# Altium PCB FMC_DIO_32ch_lvds_a.PcbDoc (part 5 of 6)
Units mm, origin at the board's own origin, x right, y up, seen from the top; angles counter-clockwise.
Board outline 69.13 x 77.46 mm, 4 copper layers (Top Layer, G, SUP, Bottom Layer), stack 1.448 mm thick; 558 components, 348 nets, 1996 pads, 784 vias.
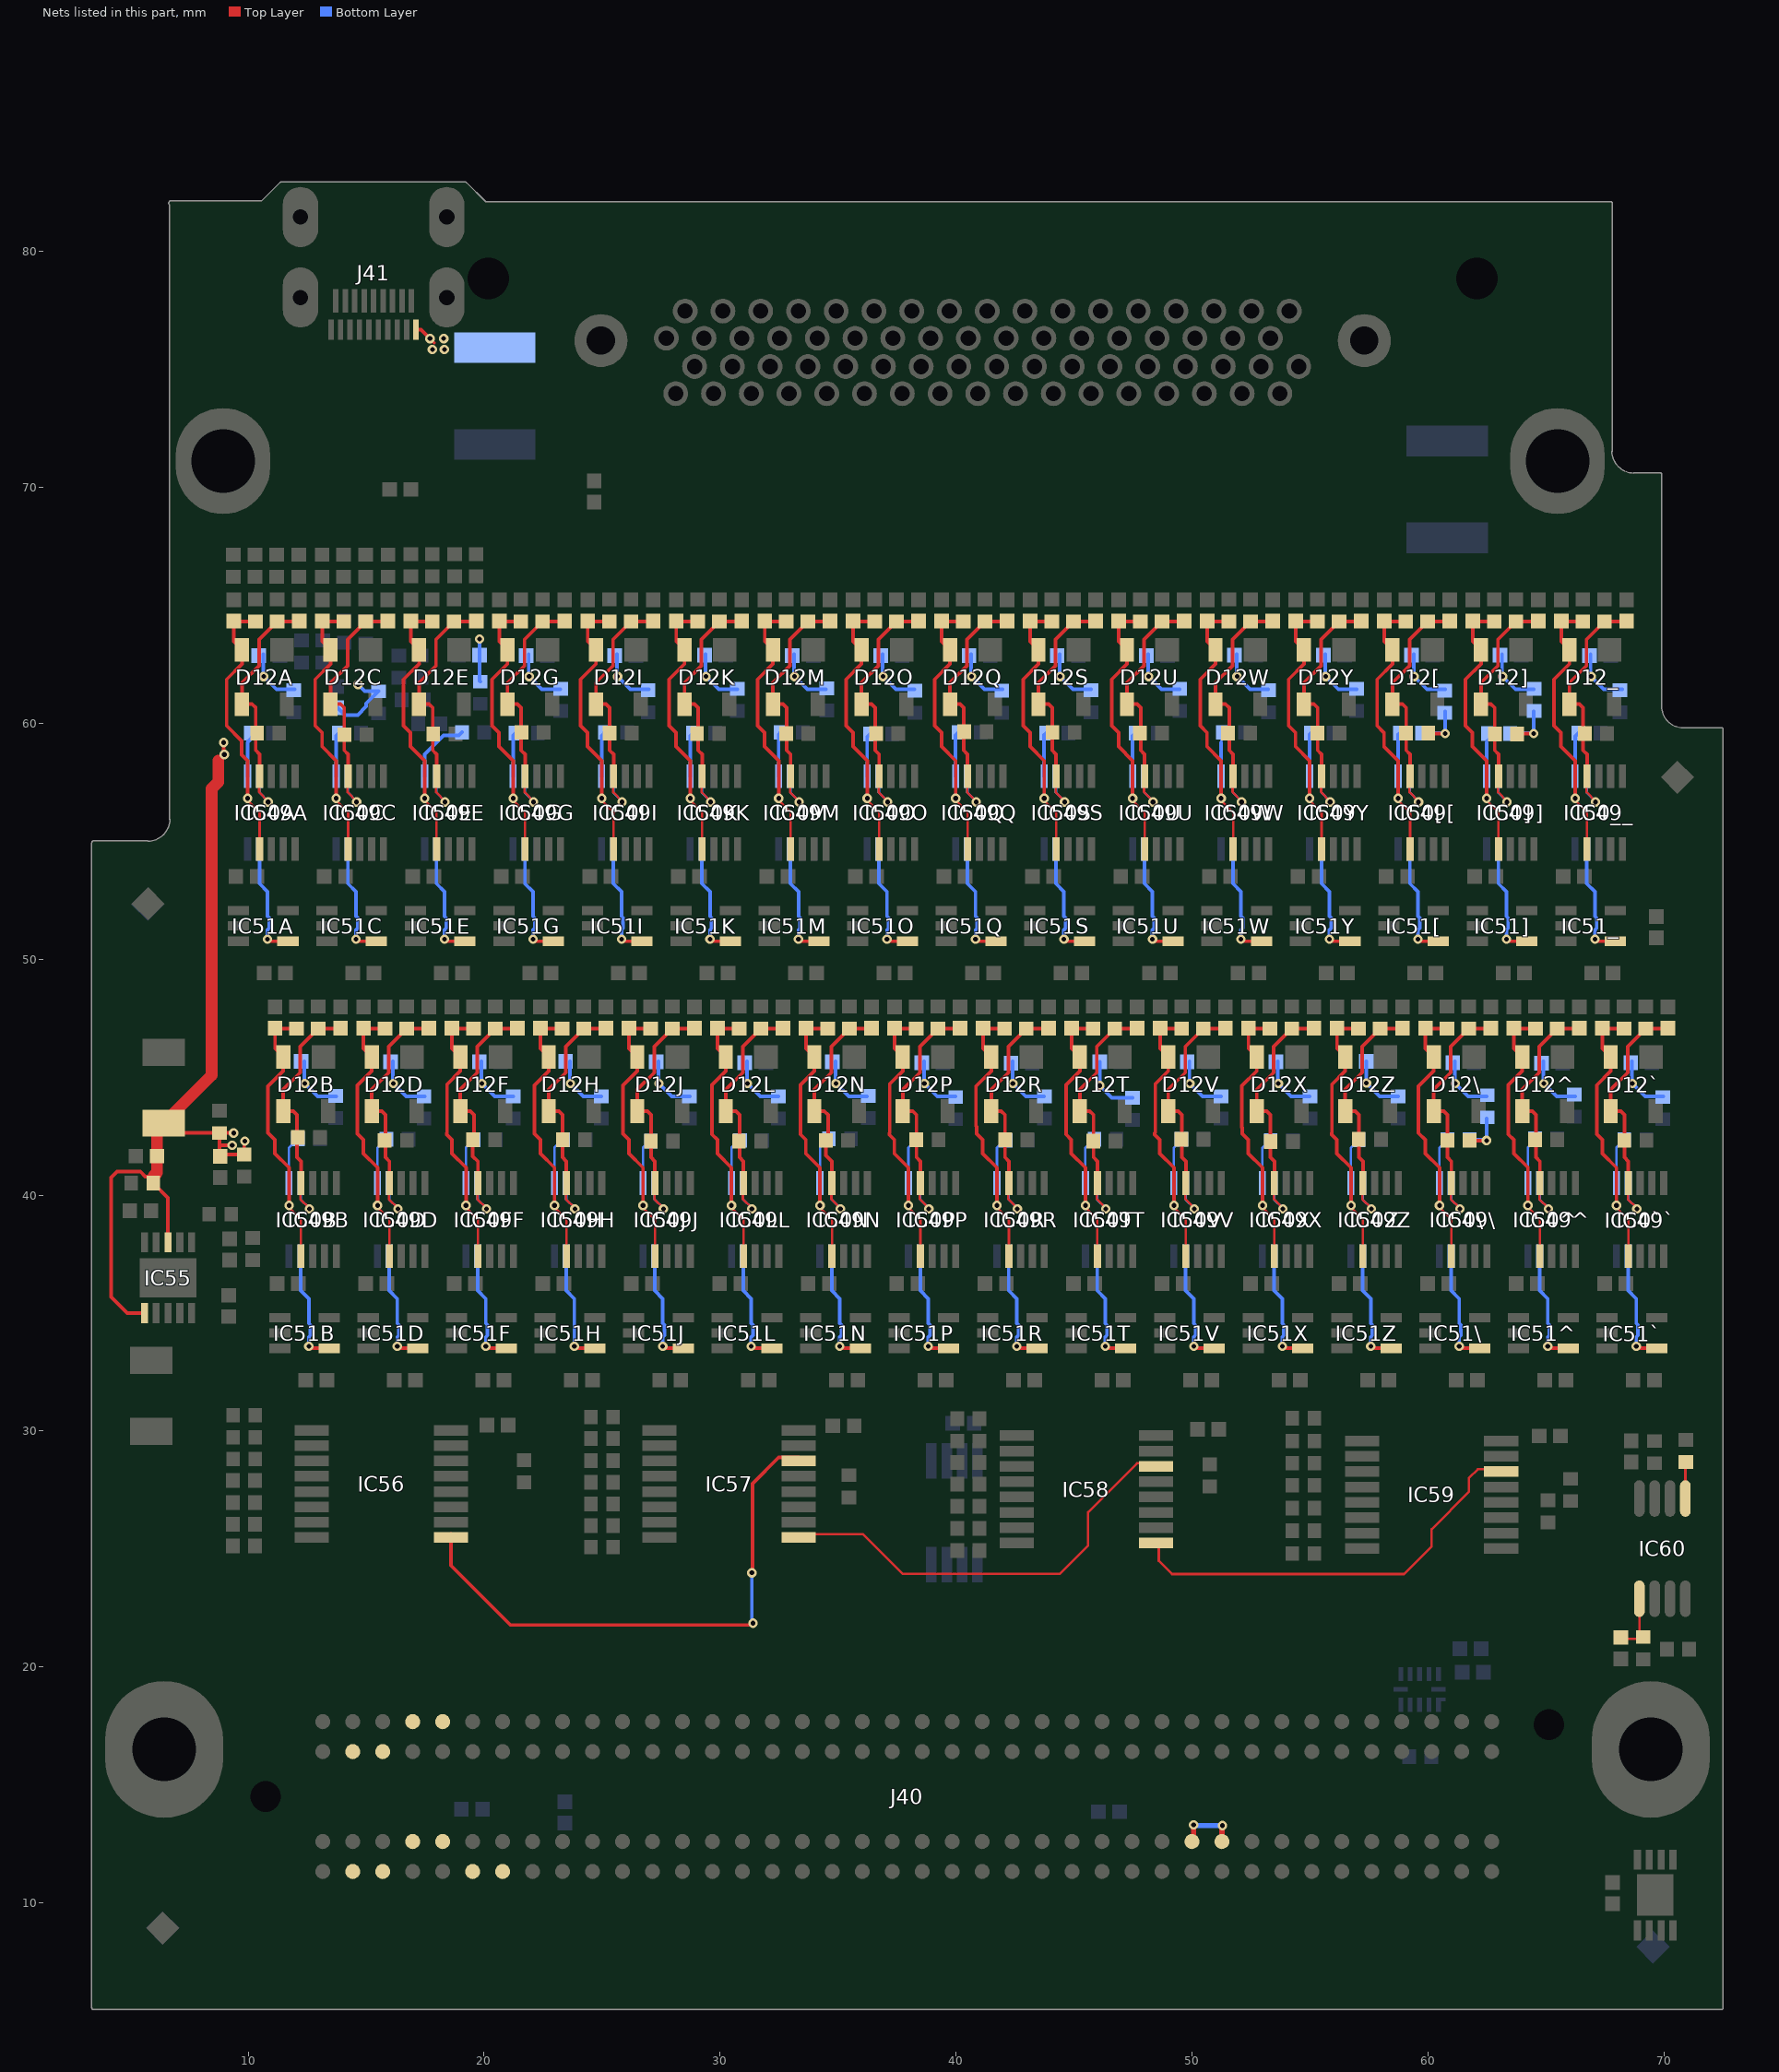
[diagram p7: the nets of this part, all layers, seen from the top]

## Via types
v1: diameter 0.4, hole 0.2, Top Layer to Bottom Layer, tented both sides, 760 vias
v2: diameter 0.4, hole 0.2, Top Layer to Bottom Layer, 24 vias

## Nets (pads, with @x,y where several pads share a name; then routed paths per layer and width w, separated by ;. In a path a pad name is that pad's centre, name@x,y a point inside that pad or via, vN(x,y) a via of type N, cw(c..) or ccw(c..) an arc to the next point about the centre after c; other vN are vias at no path point) (continued)
LVDS_REF: C139[.2 C139\.2 C139].2 C139^.2 C139_.2 C139`.2 C139A.2 C139B.2 C139C.2 C139D.2 C139E.2 C139F.2 C139G.2 C139H.2 C139I.2 C139J.2 C139K.2 C139L.2 C139M.2 C139N.2 C139O.2 C139P.2 C139Q.2 C139R.2 C139S.2 C139T.2 C139U.2 C139V.2 C139W.2 C139X.2 C139Y.2 C139Z.2 C147.2 C151.2 C152.2 IC55.3 IC55.6 R1[.2 R1\.2 R1].2 R1^.2 R1_.2 R1`.2 R1A.2 R1B.2 R1C.2 R1D.2 R1E.2 R1F.2 R1G.2 R1H.2 R1I.2 R1J.2 R1K.2 R1L.2 R1M.2 R1N.2 R1O.2 R1P.2 R1Q.2 R1R.2 R1S.2 R1T.2 R1U.2 R1V.2 R1W.2 R1X.2 R1Y.2 R1Z.2 R252.1 R254.1 R255.2 | length 116.4
  Top Layer w0.152: IC55.6@5.604,35 4.875,35 4.191,35.684 4.191,40.742 4.445,40.996 4.673,40.996 4.678,41.001 5.411,41.001 5.416,40.996 5.436,40.996 5.639,40.792 R252.1@5.982,40.792 ; C151.2@5.982,41.498 R252.1@5.982,40.792 ; IC55.3@6.604,38 6.604,39.891 R252.1@5.982,40.513 R252.1@5.982,40.792 ; C147.2@7.315,42.634 R254.1@8.788,42.634 ; C152.2@8.814,41.649 C152.2@8.885,41.72 ; v1@8.966,58.674 v1(8.966,59.182) ; v1(9.322,42.113) 8.788,42.113 ; v1(9.385,42.634) R254.1@8.788,42.634 ; v1(9.855,42.291) 9.83,42.266 R255.2@9.83,41.72 C152.2@8.885,41.72 ; v1(19.805,63.569) v1@19.837,63.602 ; 8.788,42.113 8.788,41.816 C152.2@8.885,41.72 ; 8.788,42.113 R254.1@8.788,42.634
  Top Layer w0.5: R252.1@5.982,40.792 6.14,40.95 C151.2@6.14,41.656 6.14,42.765 C147.2@6.426,43.052 8.458,45.084 8.458,57.226 8.738,57.506 8.738,58.42
  Bottom Layer w0.152: v1@10.636,61.998 C139A.2@10.636,62.919 ; v1(10.654,61.979) 11.2,61.433 R1A.2@11.975,61.433 ; v1@12.386,44.748 C139D.2@12.386,45.669 ; v1(12.404,44.729) 12.95,44.183 R1B.2@13.725,44.183 ; C139C.2@13.741,60.662 13.785,60.662 14.097,60.35 14.646,60.35 15.007,60.711 15.007,60.841 R1C.2@15.519,61.354 14.948,61.354 v1(14.656,61.646) ; v1@16.136,44.748 C139F.2@16.136,45.669 ; v1(16.154,44.729) 16.7,44.183 R1D.2@17.475,44.183 ; v1(19.805,63.569) C139E.2@19.805,62.89 19.805,61.793 R1E.2@19.837,61.76 ; v1@19.886,44.748 C139H.2@19.886,45.669 ; v1(19.904,44.729) 20.45,44.183 R1F.2@21.225,44.183 ; v1@21.886,61.998 C139G.2@21.886,62.919 ; v1(21.904,61.979) 22.45,61.433 R1G.2@23.225,61.433 ; v1@23.636,44.748 C139J.2@23.636,45.669 ; v1(23.654,44.729) 24.2,44.183 R1H.2@24.975,44.183 ; v1@25.636,61.998 C139I.2@25.636,62.919 ; v1(25.654,61.979) 26.2,61.433 R1I.2@26.975,61.433 ; v1@27.386,44.748 C139L.2@27.386,45.669 ; v1(27.404,44.729) 27.95,44.183 R1J.2@28.725,44.183 ; v1@29.386,61.998 C139K.2@29.386,62.919 ; v1(29.404,61.979) 29.95,61.433 R1K.2@30.725,61.433 ; v1@31.136,44.748 C139N.2@31.136,45.669 ; v1(31.154,44.729) 31.7,44.183 R1L.2@32.475,44.183 ; v1@33.136,61.998 C139M.2@33.136,62.919 ; v1(33.154,61.979) 33.7,61.433 R1M.2@34.475,61.433 ; v1@34.886,44.748 C139P.2@34.886,45.669 ; v1(34.904,44.729) 35.45,44.183 R1N.2@36.225,44.183 ; v1@36.886,61.998 C139O.2@36.886,62.919 ; v1(36.904,61.979) 37.45,61.433 R1O.2@38.225,61.433 ; v1@38.636,44.748 C139R.2@38.636,45.669 ; v1(38.654,44.729) 39.2,44.183 R1P.2@39.975,44.183 ; v1@40.636,61.998 C139Q.2@40.636,62.919 ; v1(40.654,61.979) 41.2,61.433 R1Q.2@41.975,61.433 ; v1@42.386,44.748 C139T.2@42.386,45.669 ; v1(42.404,44.729) 42.95,44.183 R1R.2@43.725,44.183 ; v1@44.386,61.998 C139S.2@44.386,62.919 ; v1(44.404,61.979) 44.95,61.433 R1S.2@45.725,61.433 ; C139V.2@46.083,45.644 v1(46.083,44.646) 46.596,44.133 R1T.2@47.473,44.133 ; v1@48.136,61.998 C139U.2@48.136,62.919 ; v1(48.154,61.979) 48.7,61.433 R1U.2@49.475,61.433 ; v1@49.886,44.748 C139X.2@49.886,45.669 ; v1(49.904,44.729) 50.45,44.183 R1V.2@51.225,44.183 ; v1@51.886,61.998 C139W.2@51.886,62.919 ; v1(51.904,61.979) 52.45,61.433 R1W.2@53.225,61.433 ; v1@53.636,44.748 C139Z.2@53.636,45.669 ; v1(53.654,44.729) 54.2,44.183 R1X.2@54.975,44.183 ; v1@55.636,61.998 C139Y.2@55.636,62.919 ; v1(55.654,61.979) 56.2,61.433 R1Y.2@56.975,61.433 ; C139\.2@57.386,45.669 v1(57.386,44.748) 57.95,44.183 R1Z.2@58.725,44.183 ; v1@59.386,61.998 C139[.2@59.386,62.919 ; v1(59.404,61.979) 59.95,61.433 R1[.2@60.725,61.433 ; v1@61.136,44.748 C139^.2@61.136,45.669 ; v1(61.154,44.729) 61.7,44.183 R1\.2@62.475,44.183 ; v1@63.136,61.998 C139].2@63.136,62.919 ; v1(63.154,61.979) 63.7,61.433 R1].2@64.475,61.433 ; v1@64.886,44.748 C139`.2@64.886,45.669 ; v1(64.904,44.729) 65.45,44.183 R1^.2@66.225,44.183 ; v1@66.886,61.998 C139_.2@66.886,62.919 ; v1(66.904,61.979) 67.45,61.433 R1_.2@68.225,61.433 ; v1@68.636,44.748 C139B.2@68.636,45.669 ; v1(68.654,44.729) 69.2,44.183 R1`.2@69.975,44.183
  other v1: 8.992,58.674
NetC140[_2: C140[.2 D12[.3 IC49[.8 IC50[.6 R243[.2 R245[.2 | length 11.2
  Top Layer w0.102: IC49[.8@59.236,57.761 59.214,57.738 59.214,57.081 59.595,56.7 v1(59.595,56.663)
  Top Layer w0.152: IC49[.8@59.236,57.761 59.236,58.683 59.071,58.848 59.071,59.598 59.071,60.652 58.913,60.81 D12[.3@58.489,60.81 58.489,61.721 59.211,62.443 59.211,63.547 R243[.2@59.973,64.309 60.892,64.309 C140[.2@60.912,64.329
  Bottom Layer w0.102: IC50[.6@59.228,57.761 59.228,57.066 59.595,56.7 v1(59.595,56.663)
NetC140\_2: C140\.2 D12\.3 IC49\.8 IC50\.6 R243\.2 R245\.2 | length 11.2
  Top Layer w0.102: IC49\.8@60.986,40.511 60.964,40.488 60.964,39.831 61.345,39.45 v1(61.345,39.413)
  Top Layer w0.152: R245\.2@60.82,42.316 60.821,41.598 60.986,41.433 IC49\.8@60.986,40.511 ; R245\.2@60.821,42.348 60.821,43.402 60.663,43.56 D12\.3@60.239,43.56 60.239,44.471 60.961,45.193 60.961,46.297 R243\.2@61.723,47.059 62.642,47.059 C140\.2@62.662,47.079
  Bottom Layer w0.102: IC50\.6@60.978,40.511 60.978,39.816 61.345,39.45 v1(61.345,39.413)
NetC140]_2: C140].2 D12].3 IC49].8 IC50].6 R243].2 R245].2 | length 11.2
  Top Layer w0.102: IC49].8@62.986,57.761 62.964,57.738 62.964,57.081 63.345,56.7 v1(63.345,56.663)
  Top Layer w0.152: IC49].8@62.986,57.761 62.986,58.683 62.821,58.848 62.821,59.598 62.821,60.652 62.663,60.81 D12].3@62.239,60.81 62.239,61.721 62.961,62.443 62.961,63.547 R243].2@63.723,64.309 64.642,64.309 C140].2@64.662,64.329
  Bottom Layer w0.102: IC50].6@62.978,57.761 62.978,57.066 63.345,56.7 v1(63.345,56.663)
NetC140^_2: C140^.2 D12^.3 IC49^.8 IC50^.6 R243^.2 R245^.2 | length 11.2
  Top Layer w0.102: IC49^.8@64.736,40.511 64.714,40.488 64.714,39.831 65.095,39.45 v1(65.095,39.413)
  Top Layer w0.152: R245^.2@64.529,42.342 64.571,42.299 64.571,41.598 64.736,41.433 IC49^.8@64.736,40.511 ; R245^.2@64.571,42.348 64.571,43.402 64.413,43.56 D12^.3@63.989,43.56 63.989,44.471 64.711,45.193 64.711,46.297 R243^.2@65.473,47.059 66.392,47.059 C140^.2@66.412,47.079
  Bottom Layer w0.102: IC50^.6@64.728,40.511 64.728,39.816 65.095,39.45 v1(65.095,39.413)
NetC140__2: C140_.2 D12_.3 IC49_.8 IC50_.6 R243_.2 R245_.2 | length 11.2
  Top Layer w0.102: IC49_.8@66.736,57.761 66.714,57.738 66.714,57.081 67.095,56.7 v1(67.095,56.663)
  Top Layer w0.152: IC49_.8@66.736,57.761 66.736,58.683 66.571,58.848 66.571,60.652 66.413,60.81 D12_.3@65.989,60.81 65.989,61.721 66.711,62.443 66.711,63.547 R243_.2@67.473,64.309 68.392,64.309 C140_.2@68.412,64.329
  Bottom Layer w0.102: IC50_.6@66.728,57.761 66.728,57.066 67.095,56.7 v1(67.095,56.663)
NetC140`_2: C140`.2 D12`.3 IC49`.8 IC50`.6 R243`.2 R245`.2 | length 11.2
  Top Layer w0.102: IC49`.8@68.486,40.511 68.464,40.488 68.464,39.831 68.845,39.45 v1(68.845,39.413)
  Top Layer w0.152: IC49`.8@68.486,40.511 68.486,41.433 68.321,41.598 68.321,43.402 68.163,43.56 D12`.3@67.739,43.56 67.739,44.471 68.461,45.193 68.461,46.297 R243`.2@69.223,47.059 70.142,47.059 C140`.2@70.162,47.079
  Bottom Layer w0.102: IC50`.6@68.478,40.511 68.478,39.816 68.845,39.45 v1(68.845,39.413)
NetC140A_2: C140A.2 D12A.3 IC49A.8 IC50A.6 R243A.2 R245A.2 | length 11.2
  Top Layer w0.102: IC49A.8@10.486,57.761 10.464,57.738 10.464,57.081 10.845,56.7 v1(10.845,56.663)
  Top Layer w0.152: IC49A.8@10.486,57.761 10.486,58.683 10.321,58.848 10.321,60.652 10.163,60.81 D12A.3@9.739,60.81 9.739,61.721 10.461,62.443 10.461,63.547 R243A.2@11.223,64.309 12.142,64.309 C140A.2@12.162,64.329
  Bottom Layer w0.102: IC50A.6@10.478,57.761 10.478,57.066 10.845,56.7 v1(10.845,56.663)
NetC140B_2: C140B.2 D12B.3 IC49B.8 IC50B.6 R243B.2 R245B.2 | length 11.2
  Top Layer w0.102: IC49B.8@12.236,40.511 12.214,40.488 12.214,39.831 12.595,39.45 v1(12.595,39.413)
  Top Layer w0.152: IC49B.8@12.236,40.511 12.236,41.433 12.071,41.598 12.071,42.348 12.071,43.402 11.913,43.56 D12B.3@11.489,43.56 11.489,44.471 12.211,45.193 12.211,46.297 R243B.2@12.973,47.059 13.892,47.059 C140B.2@13.912,47.079
  Bottom Layer w0.102: IC50B.6@12.228,40.511 12.228,39.816 12.595,39.45 v1(12.595,39.413)
NetC140C_2: C140C.2 D12C.3 IC49C.8 IC50C.6 R243C.2 R245C.2 | length 11.2
  Top Layer w0.102: IC49C.8@14.236,57.761 14.214,57.738 14.214,57.081 14.595,56.7 v1(14.595,56.663)
  Top Layer w0.152: IC49C.8@14.236,57.761 14.236,58.683 14.071,58.848 14.071,60.652 13.913,60.81 D12C.3@13.489,60.81 13.489,61.721 14.211,62.443 14.211,63.547 R243C.2@14.973,64.309 15.892,64.309 C140C.2@15.912,64.329
  Bottom Layer w0.102: IC50C.6@14.228,57.761 14.228,57.066 14.595,56.7 v1(14.595,56.663)
NetC140D_2: C140D.2 D12D.3 IC49D.8 IC50D.6 R243D.2 R245D.2 | length 11.2
  Top Layer w0.102: IC49D.8@15.986,40.511 15.964,40.488 15.964,39.831 16.345,39.45 v1(16.345,39.413)
  Top Layer w0.152: R245D.2@15.786,42.316 15.821,42.281 15.821,41.598 15.986,41.433 IC49D.8@15.986,40.511 ; R245D.2@15.821,42.348 15.821,43.402 15.663,43.56 D12D.3@15.239,43.56 15.239,44.471 15.961,45.193 15.961,46.297 R243D.2@16.723,47.059 17.642,47.059 C140D.2@17.662,47.079
  Bottom Layer w0.102: IC50D.6@15.978,40.511 15.978,39.816 16.345,39.45 v1(16.345,39.413)
NetC140E_2: C140E.2 D12E.3 IC49E.8 IC50E.6 R243E.2 R245E.2 | length 11.2
  Top Layer w0.102: IC49E.8@17.986,57.761 17.964,57.738 17.964,57.081 18.345,56.7 v1(18.345,56.663)
  Top Layer w0.152: IC49E.8@17.986,57.761 17.986,58.683 17.821,58.848 17.821,60.652 17.663,60.81 D12E.3@17.239,60.81 17.239,61.721 17.961,62.443 17.961,63.547 R243E.2@18.723,64.309 19.642,64.309 C140E.2@19.662,64.329
  Bottom Layer w0.102: IC50E.6@17.978,57.761 17.978,57.066 18.345,56.7 v1(18.345,56.663)
NetC140F_2: C140F.2 D12F.3 IC49F.8 IC50F.6 R243F.2 R245F.2 | length 11.2
  Top Layer w0.102: IC49F.8@19.736,40.511 19.714,40.488 19.714,39.831 20.095,39.45 v1(20.095,39.413)
  Top Layer w0.152: R245F.2@19.52,42.342 19.52,41.65 19.736,41.433 IC49F.8@19.736,40.511 ; R245F.2@19.571,42.348 19.571,43.402 19.413,43.56 D12F.3@18.989,43.56 18.989,44.471 19.711,45.193 19.711,46.297 R243F.2@20.473,47.059 21.392,47.059 C140F.2@21.412,47.079
  Bottom Layer w0.102: IC50F.6@19.728,40.511 19.728,39.816 20.095,39.45 v1(20.095,39.413)
NetC140G_2: C140G.2 D12G.3 IC49G.8 IC50G.6 R243G.2 R245G.2 | length 11.2
  Top Layer w0.102: IC49G.8@21.736,57.761 21.714,57.738 21.714,57.081 22.095,56.7 v1(22.095,56.663)
  Top Layer w0.152: IC49G.8@21.736,57.761 21.736,58.683 21.571,58.848 21.571,59.598 21.571,60.652 21.413,60.81 D12G.3@20.989,60.81 20.989,61.721 21.711,62.443 21.711,63.547 R243G.2@22.473,64.309 23.392,64.309 C140G.2@23.412,64.329
  Bottom Layer w0.102: IC50G.6@21.728,57.761 21.728,57.066 22.095,56.7 v1(22.095,56.663)
NetC140H_2: C140H.2 D12H.3 IC49H.8 IC50H.6 R243H.2 R245H.2 | length 11.2
  Top Layer w0.102: IC49H.8@23.486,40.511 23.464,40.488 23.464,39.831 23.845,39.45 v1(23.845,39.413)
  Top Layer w0.152: R245H.2@23.321,42.348 23.321,43.402 23.163,43.56 D12H.3@22.739,43.56 22.739,44.471 23.461,45.193 23.461,46.297 R243H.2@24.223,47.059 25.142,47.059 C140H.2@25.162,47.079 ; R245H.2@23.33,42.342 23.321,42.333 23.321,41.598 23.486,41.433 IC49H.8@23.486,40.511
  Bottom Layer w0.102: IC50H.6@23.478,40.511 23.478,39.816 23.845,39.45 v1(23.845,39.413)
NetC140I_2: C140I.2 D12I.3 IC49I.8 IC50I.6 R243I.2 R245I.2 | length 11.2
  Top Layer w0.102: IC49I.8@25.486,57.761 25.464,57.738 25.464,57.081 25.845,56.7 v1(25.845,56.663)
  Top Layer w0.152: IC49I.8@25.486,57.761 25.486,58.683 25.321,58.848 25.321,60.652 25.163,60.81 D12I.3@24.739,60.81 24.739,61.721 25.461,62.443 25.461,63.547 R243I.2@26.223,64.309 27.142,64.309 C140I.2@27.162,64.329
  Bottom Layer w0.102: IC50I.6@25.478,57.761 25.478,57.066 25.845,56.7 v1(25.845,56.663)
NetC140J_2: C140J.2 D12J.3 IC49J.8 IC50J.6 R243J.2 R245J.2 | length 11.2
  Top Layer w0.102: IC49J.8@27.236,40.511 27.214,40.488 27.214,39.831 27.595,39.45 v1(27.595,39.413)
  Top Layer w0.152: IC49J.8@27.236,40.511 27.236,41.433 27.071,41.598 27.071,43.402 26.913,43.56 D12J.3@26.489,43.56 26.489,44.471 27.211,45.193 27.211,46.297 R243J.2@27.973,47.059 28.892,47.059 C140J.2@28.912,47.079
  Bottom Layer w0.102: IC50J.6@27.228,40.511 27.228,39.816 27.595,39.45 v1(27.595,39.413)
NetC140K_2: C140K.2 D12K.3 IC49K.8 IC50K.6 R243K.2 R245K.2 | length 11.2
  Top Layer w0.102: IC49K.8@29.236,57.761 29.214,57.738 29.214,57.081 29.595,56.7 v1(29.595,56.663)
  Top Layer w0.152: IC49K.8@29.236,57.761 29.236,58.683 29.071,58.848 29.071,59.598 29.071,60.652 28.913,60.81 D12K.3@28.489,60.81 28.489,61.721 29.211,62.443 29.211,63.547 R243K.2@29.973,64.309 30.892,64.309 C140K.2@30.912,64.329
  Bottom Layer w0.102: IC50K.6@29.228,57.761 29.228,57.066 29.595,56.7 v1(29.595,56.663)
NetC140L_2: C140L.2 D12L.3 IC49L.8 IC50L.6 R243L.2 R245L.2 | length 11.1
  Top Layer w0.102: IC49L.8@30.986,40.511 30.964,40.488 30.964,39.831 31.345,39.45 v1(31.345,39.413)
  Top Layer w0.152: R245L.2@30.797,42.291 30.821,42.267 30.821,41.598 30.986,41.433 IC49L.8@30.986,40.511 ; R245L.2@30.821,42.348 30.821,43.402 30.663,43.56 D12L.3@30.239,43.56 30.239,44.471 30.961,45.193 30.961,46.297 R243L.2@31.723,47.059 32.642,47.059 C140L.2@32.662,47.079
  Bottom Layer w0.102: IC50L.6@30.978,40.511 30.978,39.816 31.345,39.45 v1(31.345,39.413)
NetC140M_2: C140M.2 D12M.3 IC49M.8 IC50M.6 R243M.2 R245M.2 | length 11.2
  Top Layer w0.102: IC49M.8@32.986,57.761 32.964,57.738 32.964,57.081 33.345,56.7 v1(33.345,56.663)
  Top Layer w0.152: IC49M.8@32.986,57.761 32.986,58.683 32.821,58.848 32.821,59.598 32.821,60.652 32.663,60.81 D12M.3@32.239,60.81 32.239,61.721 32.961,62.443 32.961,63.547 R243M.2@33.723,64.309 34.642,64.309 C140M.2@34.662,64.329
  Bottom Layer w0.102: IC50M.6@32.978,57.761 32.978,57.066 33.345,56.7 v1(33.345,56.663)
NetC140N_2: C140N.2 D12N.3 IC49N.8 IC50N.6 R243N.2 R245N.2 | length 11.2
  Top Layer w0.102: IC49N.8@34.736,40.511 34.714,40.488 34.714,39.831 35.095,39.45 v1(35.095,39.413)
  Top Layer w0.152: R245N.2@34.48,42.316 34.48,41.689 34.736,41.433 IC49N.8@34.736,40.511 ; R245N.2@34.571,42.348 34.571,43.402 34.413,43.56 D12N.3@33.989,43.56 33.989,44.471 34.711,45.193 34.711,46.297 R243N.2@35.473,47.059 36.392,47.059 C140N.2@36.412,47.079
  Bottom Layer w0.102: IC50N.6@34.728,40.511 34.728,39.816 35.095,39.45 v1(35.095,39.413)
NetC140O_2: C140O.2 D12O.3 IC49O.8 IC50O.6 R243O.2 R245O.2 | length 11.2
  Top Layer w0.102: IC49O.8@36.736,57.761 36.714,57.738 36.714,57.081 37.095,56.7 v1(37.095,56.663)
  Top Layer w0.152: IC49O.8@36.736,57.761 36.736,58.683 36.571,58.848 36.571,59.598 36.571,60.652 36.413,60.81 D12O.3@35.989,60.81 35.989,61.721 36.711,62.443 36.711,63.547 R243O.2@37.473,64.309 38.392,64.309 C140O.2@38.412,64.329
  Bottom Layer w0.102: IC50O.6@36.728,57.761 36.728,57.066 37.095,56.7 v1(37.095,56.663)
NetC140P_2: C140P.2 D12P.3 IC49P.8 IC50P.6 R243P.2 R245P.2 | length 11.2
  Top Layer w0.102: IC49P.8@38.486,40.511 38.464,40.488 38.464,39.831 38.845,39.45 v1(38.845,39.413)
  Top Layer w0.152: R245P.2@38.316,42.342 38.321,42.337 38.321,41.598 38.486,41.433 IC49P.8@38.486,40.511 ; R245P.2@38.321,42.348 38.321,43.402 38.163,43.56 D12P.3@37.739,43.56 37.739,44.471 38.461,45.193 38.461,46.297 R243P.2@39.223,47.059 40.142,47.059 C140P.2@40.162,47.079
  Bottom Layer w0.102: IC50P.6@38.478,40.511 38.478,39.816 38.845,39.45 v1(38.845,39.413)
NetC140Q_2: C140Q.2 D12Q.3 IC49Q.8 IC50Q.6 R243Q.2 R245Q.2 | length 11.2
  Top Layer w0.102: IC49Q.8@40.486,57.761 40.464,57.738 40.464,57.081 40.845,56.7 v1(40.845,56.663)
  Top Layer w0.152: IC49Q.8@40.486,57.761 40.486,58.683 40.321,58.848 40.321,59.598 40.321,60.652 40.163,60.81 D12Q.3@39.739,60.81 39.739,61.721 40.461,62.443 40.461,63.547 R243Q.2@41.223,64.309 42.142,64.309 C140Q.2@42.162,64.329
  Bottom Layer w0.102: IC50Q.6@40.478,57.761 40.478,57.066 40.845,56.7 v1(40.845,56.663)
NetC140R_2: C140R.2 D12R.3 IC49R.8 IC50R.6 R243R.2 R245R.2 | length 11.2
  Top Layer w0.102: IC49R.8@42.236,40.511 42.214,40.488 42.214,39.831 42.595,39.45 v1(42.595,39.413)
  Top Layer w0.152: R245R.2@42.071,42.348 42.071,43.402 41.913,43.56 D12R.3@41.489,43.56 41.489,44.471 42.211,45.193 42.211,46.297 R243R.2@42.973,47.059 43.892,47.059 C140R.2@43.912,47.079 ; R245R.2@42.075,42.342 42.071,42.338 42.071,41.598 42.236,41.433 IC49R.8@42.236,40.511
  Bottom Layer w0.102: IC50R.6@42.228,40.511 42.228,39.816 42.595,39.45 v1(42.595,39.413)
NetC140S_2: C140S.2 D12S.3 IC49S.8 IC50S.6 R243S.2 R245S.2 | length 11.2
  Top Layer w0.102: IC49S.8@44.236,57.761 44.214,57.738 44.214,57.081 44.595,56.7 v1(44.595,56.663)
  Top Layer w0.152: IC49S.8@44.236,57.761 44.236,58.683 44.071,58.848 44.071,59.598 44.071,60.652 43.913,60.81 D12S.3@43.489,60.81 43.489,61.721 44.211,62.443 44.211,63.547 R243S.2@44.973,64.309 45.892,64.309 C140S.2@45.912,64.329
  Bottom Layer w0.102: IC50S.6@44.228,57.761 44.228,57.066 44.595,56.7 v1(44.595,56.663)
NetC140T_2: C140T.2 D12T.3 IC49T.8 IC50T.6 R243T.2 R245T.2 | length 11.2
  Top Layer w0.102: IC49T.8@45.986,40.511 45.964,40.488 45.964,39.831 46.345,39.45 v1(46.345,39.413)
  Top Layer w0.152: IC49T.8@45.986,40.511 45.986,41.433 45.821,41.598 45.821,43.402 45.663,43.56 D12T.3@45.239,43.56 45.239,44.471 45.961,45.193 45.961,46.297 R243T.2@46.723,47.059 47.642,47.059 C140T.2@47.662,47.079
  Bottom Layer w0.102: IC50T.6@45.978,40.511 45.978,39.816 46.345,39.45 v1(46.345,39.413)
NetC140U_2: C140U.2 D12U.3 IC49U.8 IC50U.6 R243U.2 R245U.2 | length 11.2
  Top Layer w0.102: IC49U.8@47.986,57.761 47.964,57.738 47.964,57.081 48.345,56.7 v1(48.345,56.663)
  Top Layer w0.152: IC49U.8@47.986,57.761 47.986,58.683 47.821,58.848 47.821,59.598 47.821,60.652 47.663,60.81 D12U.3@47.239,60.81 47.239,61.721 47.961,62.443 47.961,63.547 R243U.2@48.723,64.309 49.642,64.309 C140U.2@49.662,64.329
  Bottom Layer w0.102: IC50U.6@47.978,57.761 47.978,57.066 48.345,56.7 v1(48.345,56.663)
NetC140V_2: C140V.2 D12V.3 IC49V.8 IC50V.6 R243V.2 R245V.2 | length 11.2
  Top Layer w0.102: IC49V.8@49.736,40.511 49.714,40.488 49.714,39.831 50.095,39.45 v1(50.095,39.413)
  Top Layer w0.152: IC49V.8@49.736,40.511 49.736,41.433 49.571,41.598 49.571,43.402 49.413,43.56 D12V.3@48.989,43.56 48.989,44.471 49.711,45.193 49.711,46.297 R243V.2@50.473,47.059 51.392,47.059 C140V.2@51.412,47.079
  Bottom Layer w0.102: IC50V.6@49.728,40.511 49.728,39.816 50.095,39.45 v1(50.095,39.413)
NetC140W_2: C140W.2 D12W.3 IC49W.8 IC50W.6 R243W.2 R245W.2 | length 11.2
  Top Layer w0.102: IC49W.8@51.736,57.761 51.714,57.738 51.714,57.081 52.095,56.7 v1(52.095,56.663)
  Top Layer w0.152: IC49W.8@51.736,57.761 51.736,58.683 51.571,58.848 51.571,59.598 51.571,60.652 51.413,60.81 D12W.3@50.989,60.81 50.989,61.721 51.711,62.443 51.711,63.547 R243W.2@52.473,64.309 53.392,64.309 C140W.2@53.412,64.329
  Bottom Layer w0.102: IC50W.6@51.728,57.761 51.728,57.066 52.095,56.7 v1(52.095,56.663)
NetC140X_2: C140X.2 D12X.3 IC49X.8 IC50X.6 R243X.2 R245X.2 | length 11.1
  Top Layer w0.102: IC49X.8@53.486,40.511 53.464,40.488 53.464,39.831 53.845,39.45 v1(53.845,39.413)
  Top Layer w0.152: R245X.2@53.321,42.348 53.321,43.402 53.163,43.56 D12X.3@52.739,43.56 52.739,44.471 53.461,45.193 53.461,46.297 R243X.2@54.223,47.059 55.142,47.059 C140X.2@55.162,47.079 ; R245X.2@53.327,42.266 53.321,42.259 53.321,41.598 53.486,41.433 IC49X.8@53.486,40.511
  Bottom Layer w0.102: IC50X.6@53.478,40.511 53.478,39.816 53.845,39.45 v1(53.845,39.413)
NetC140Y_2: C140Y.2 D12Y.3 IC49Y.8 IC50Y.6 R243Y.2 R245Y.2 | length 11.2
  Top Layer w0.102: IC49Y.8@55.486,57.761 55.464,57.738 55.464,57.081 55.845,56.7 v1(55.845,56.663)
  Top Layer w0.152: IC49Y.8@55.486,57.761 55.486,58.683 55.321,58.848 55.321,59.598 55.321,60.652 55.163,60.81 D12Y.3@54.739,60.81 54.739,61.721 55.461,62.443 55.461,63.547 R243Y.2@56.223,64.309 57.142,64.309 C140Y.2@57.162,64.329
  Bottom Layer w0.102: IC50Y.6@55.478,57.761 55.478,57.066 55.845,56.7 v1(55.845,56.663)
NetC140Z_2: C140Z.2 D12Z.3 IC49Z.8 IC50Z.6 R243Z.2 R245Z.2 | length 11.2
  Top Layer w0.102: IC49Z.8@57.236,40.511 57.214,40.488 57.214,39.831 57.595,39.45 v1(57.595,39.413)
  Top Layer w0.152: R245Z.2@57.061,42.367 R245Z.2@57.071,42.357 ; IC49Z.8@57.236,40.511 57.236,41.433 57.071,41.598 R245Z.2@57.071,42.357 ; C140Z.2@58.912,47.079 58.892,47.059 R243Z.2@57.973,47.059 57.211,46.297 57.211,45.193 56.489,44.471 D12Z.3@56.489,43.56 56.913,43.56 57.071,43.402 R245Z.2@57.071,42.357
  Bottom Layer w0.102: IC50Z.6@57.228,40.511 57.228,39.816 57.595,39.45 v1(57.595,39.413)
NetC141[_2: C141[.2 D12[.2 IC49[.1 IC50[.5 R244[.2 R246[.2 | length 14.4
  Top Layer w0.102: v1(58.731,56.816) 58.731,56.728 59.236,56.222 IC49[.1@59.236,54.661
  Top Layer w0.152: v1(58.731,56.816) 58.731,58.416 58.131,59.016 58.131,59.598 57.839,59.89 57.839,61.86 58.489,62.51 D12[.2@58.489,63.11 58.139,63.46 C141[.2@58.139,64.33 58.159,64.31 R246[.2@59.054,64.31
  Bottom Layer w0.102: IC50[.5@58.728,57.761 58.731,57.758 v1(58.731,56.816)
  Bottom Layer w0.152: IC50[.5@58.728,57.761 58.728,59.516 R244[.2@58.801,59.588
NetC141\_2: C141\.2 D12\.2 IC49\.1 IC50\.5 R244\.2 R246\.2 | length 14.5
  Top Layer w0.102: v1(60.481,39.566) 60.481,39.478 60.986,38.972 IC49\.1@60.986,37.411
  Top Layer w0.152: v1(60.481,39.566) 60.481,41.166 59.881,41.766 59.881,42.348 59.596,42.633 59.596,42.872 59.589,42.879 59.589,44.61 60.239,45.26 D12\.2@60.239,45.86 59.889,46.21 C141\.2@59.889,47.08 59.909,47.06 R246\.2@60.804,47.06
  Bottom Layer w0.102: 60.478,41.98 IC50\.5@60.478,40.511 60.481,40.508 v1(60.481,39.566) ; 60.478,42.009 R244\.2@60.811,42.342
NetC141]_2: C141].2 D12].2 IC49].1 IC50].5 R244].2 R246].2 | length 15
  Top Layer w0.102: v1(62.481,56.816) 62.481,56.728 62.986,56.222 IC49].1@62.986,54.661
  Top Layer w0.152: v1(62.481,56.816) 62.481,58.416 61.881,59.016 ; R246].2@62.804,64.31 61.909,64.31 C141].2@61.889,64.33 61.889,63.46 D12].2@62.239,63.11 62.239,62.51 61.589,61.86 61.589,59.89 61.881,59.598 ; 61.881,59.016 61.881,59.598 ; 61.881,59.016 61.881,59.598
  Bottom Layer w0.102: IC50].5@62.478,57.761 62.481,57.758 v1(62.481,56.816) ; R244].2@62.478,59.259 R244].2@62.811,59.592
  Bottom Layer w0.152: IC50].5@62.478,57.761 62.478,59.167
NetC141^_2: C141^.2 D12^.2 IC49^.1 IC50^.5 R244^.2 R246^.2 | length 14.4
  Top Layer w0.102: v1(64.231,39.566) 64.231,39.478 64.736,38.972 IC49^.1@64.736,37.411
  Top Layer w0.152: v1(64.231,39.566) 64.231,41.166 63.631,41.766 63.631,42.348 63.404,42.575 63.404,44.675 63.989,45.26 D12^.2@63.989,45.86 63.639,46.21 C141^.2@63.639,47.08 63.659,47.06 R246^.2@64.554,47.06
  Bottom Layer w0.102: 64.228,41.98 IC50^.5@64.228,40.511 64.231,40.508 v1(64.231,39.566) ; 64.228,42.009 R244^.2@64.561,42.342
NetC141__2: C141_.2 D12_.2 IC49_.1 IC50_.5 R244_.2 R246_.2 | length 14.6
  Top Layer w0.102: v1(66.231,56.816) 66.231,56.728 66.736,56.222 IC49_.1@66.736,54.661
  Top Layer w0.152: v1(66.231,56.816) 66.231,58.416 65.631,59.016 65.631,59.598 65.339,59.89 65.339,61.86 65.989,62.51 D12_.2@65.989,63.11 65.639,63.46 C141_.2@65.639,64.33 65.659,64.31 R246_.2@66.554,64.31
  Bottom Layer w0.102: IC50_.5@66.228,57.761 66.231,57.758 v1(66.231,56.816) ; R244_.2@66.464,59.495 R244_.2@66.561,59.592
  Bottom Layer w0.152: IC50_.5@66.228,57.761 66.228,59.447 R244_.2@66.37,59.588
NetC141`_2: C141`.2 D12`.2 IC49`.1 IC50`.5 R244`.2 R246`.2 | length 14.4
  Top Layer w0.102: v1(67.981,39.566) 67.981,39.478 68.486,38.972 IC49`.1@68.486,37.411
  Top Layer w0.152: v1(67.981,39.566) 67.981,41.166 67.381,41.766 67.381,42.348 67.145,42.584 67.145,44.666 67.739,45.26 D12`.2@67.739,45.86 67.389,46.21 C141`.2@67.389,47.08 67.409,47.06 R246`.2@68.304,47.06
  Bottom Layer w0.102: 67.978,41.98 IC50`.5@67.978,40.511 67.981,40.508 v1(67.981,39.566) ; 67.978,42.009 R244`.2@68.311,42.342
NetC141A_2: C141A.2 D12A.2 IC49A.1 IC50A.5 R244A.2 R246A.2 | length 15
  Top Layer w0.102: v1(9.981,56.816) 9.981,56.728 10.486,56.222 IC49A.1@10.486,54.661
  Top Layer w0.152: v1(9.981,56.816) 9.981,58.416 9.728,58.669 9.728,59.251 9.089,59.89 9.089,61.86 9.739,62.51 D12A.2@9.739,63.11 9.389,63.46 C141A.2@9.389,64.33 9.409,64.31 R246A.2@10.304,64.31
  Bottom Layer w0.102: IC50A.5@9.978,57.761 9.981,57.758 v1(9.981,56.816) ; 9.978,59.259 R244A.2@10.311,59.592
  Bottom Layer w0.152: IC50A.5@9.978,57.761 9.969,57.77 9.969,59.182 R244A.2@10.376,59.588
NetC141B_2: C141B.2 D12B.2 IC49B.1 IC50B.5 R244B.2 R246B.2 | length 15.1
  Top Layer w0.102: v1(11.731,39.566) 11.731,39.478 12.236,38.972 IC49B.1@12.236,37.411
  Top Layer w0.152: v1(11.731,39.566) 11.731,41.166 11.131,41.766 ; R246B.2@12.054,47.06 11.159,47.06 C141B.2@11.139,47.08 11.139,46.21 D12B.2@11.489,45.86 11.489,45.26 10.839,44.61 10.839,42.64 11.131,42.348 ; 11.131,41.766 11.131,42.348 ; 11.131,41.766 11.131,42.348
  Bottom Layer w0.102: 11.728,41.98 IC50B.5@11.728,40.511 11.731,40.508 v1(11.731,39.566) ; 11.728,42.009 R244B.2@12.061,42.342
NetC141C_2: C141C.2 D12C.2 IC49C.1 IC50C.5 R244C.2 R246C.2 | length 14.4
  Top Layer w0.102: v1(13.731,56.816) 13.731,56.728 14.236,56.222 IC49C.1@14.236,54.661
  Top Layer w0.152: v1(13.731,56.816) 13.731,58.416 13.131,59.016 13.131,59.598 12.839,59.89 12.839,61.86 13.489,62.51 D12C.2@13.489,63.11 13.139,63.46 C141C.2@13.139,64.33 13.159,64.31 R246C.2@14.054,64.31
  Bottom Layer w0.102: IC50C.5@13.728,57.761 13.731,57.758 v1(13.731,56.816)
  Bottom Layer w0.152: IC50C.5@13.728,57.761 13.728,59.474 R244C.2@13.843,59.588
NetC141D_2: C141D.2 D12D.2 IC49D.1 IC50D.5 R244D.2 R246D.2 | length 14.4
  Top Layer w0.102: v1(15.481,39.566) 15.481,39.478 15.986,38.972 IC49D.1@15.986,37.411
  Top Layer w0.152: v1(15.481,39.566) 15.481,41.166 14.881,41.766 14.881,42.348 14.629,42.6 14.629,44.649 15.239,45.26 D12D.2@15.239,45.86 14.889,46.21 C141D.2@14.889,47.08 14.909,47.06 R246D.2@15.804,47.06
  Bottom Layer w0.102: 15.478,41.98 IC50D.5@15.478,40.511 15.481,40.508 v1(15.481,39.566) ; 15.478,42.009 R244D.2@15.811,42.342
NetC141E_2: C141E.2 D12E.2 IC49E.1 IC50E.5 R244E.2 R246E.2 | length 15.4
  Top Layer w0.102: v1(17.481,56.816) 17.481,56.728 17.986,56.222 IC49E.1@17.986,54.661
  Top Layer w0.152: v1(17.481,56.816) 17.481,58.416 16.881,59.016 16.881,59.598 16.589,59.89 16.589,61.86 17.239,62.51 D12E.2@17.239,63.11 16.889,63.46 C141E.2@16.889,64.33 16.909,64.31 R246E.2@17.804,64.31
  Bottom Layer w0.102: IC50E.5@17.478,57.761 17.481,57.758 v1(17.481,56.816)
  Bottom Layer w0.152: IC50E.5@17.478,57.761 17.478,58.677 18.283,59.482 18.93,59.482 R244E.2@19.063,59.614
NetC141F_2: C141F.2 D12F.2 IC49F.1 IC50F.5 R244F.2 R246F.2 | length 14.4
  Top Layer w0.102: v1(19.231,39.566) 19.231,39.478 19.736,38.972 IC49F.1@19.736,37.411
  Top Layer w0.152: v1(19.231,39.566) 19.231,41.166 18.631,41.766 18.631,42.348 18.417,42.562 18.417,42.626 18.428,42.637 18.428,44.698 18.989,45.26 D12F.2@18.989,45.86 18.639,46.21 C141F.2@18.639,47.08 18.659,47.06 R246F.2@19.554,47.06
  Bottom Layer w0.102: 19.228,41.98 IC50F.5@19.228,40.511 19.231,40.508 v1(19.231,39.566) ; 19.228,42.009 R244F.2@19.561,42.342
NetC141G_2: C141G.2 D12G.2 IC49G.1 IC50G.5 R244G.2 R246G.2 | length 14.4
  Top Layer w0.102: v1(21.231,56.816) 21.231,56.728 21.736,56.222 IC49G.1@21.736,54.661
  Top Layer w0.152: v1(21.231,56.816) 21.231,58.416 20.631,59.016 20.631,59.598 20.339,59.89 20.339,61.86 20.989,62.51 D12G.2@20.989,63.11 20.639,63.46 C141G.2@20.639,64.33 20.659,64.31 R246G.2@21.554,64.31
  Bottom Layer w0.102: IC50G.5@21.228,57.761 21.231,57.758 v1(21.231,56.816)
  Bottom Layer w0.152: IC50G.5@21.228,57.761 21.228,59.481 R244G.2@21.336,59.588
NetC141H_2: C141H.2 D12H.2 IC49H.1 IC50H.5 R244H.2 R246H.2 | length 14.4
  Top Layer w0.102: v1(22.981,39.566) 22.981,39.478 23.486,38.972 IC49H.1@23.486,37.411
  Top Layer w0.152: v1(22.981,39.566) 22.981,41.166 22.381,41.766 22.381,42.348 22.129,42.6 22.129,44.649 22.739,45.26 D12H.2@22.739,45.86 22.389,46.21 C141H.2@22.389,47.08 22.409,47.06 R246H.2@23.304,47.06
  Bottom Layer w0.102: 22.978,41.98 IC50H.5@22.978,40.511 22.981,40.508 v1(22.981,39.566) ; 22.978,42.009 R244H.2@23.311,42.342
NetC141I_2: C141I.2 D12I.2 IC49I.1 IC50I.5 R244I.2 R246I.2 | length 15.5
  Top Layer w0.102: v1(24.981,56.816) 24.981,56.728 25.486,56.222 IC49I.1@25.486,54.661
  Top Layer w0.152: v1(24.981,56.816) 24.981,58.416 24.381,59.016 ; R246I.2@25.304,64.31 24.409,64.31 C141I.2@24.389,64.33 24.389,63.46 D12I.2@24.739,63.11 24.739,62.51 24.089,61.86 24.089,59.89 24.381,59.598 ; 24.381,59.016 24.381,59.598 ; 24.381,59.016 24.381,59.598
  Bottom Layer w0.102: IC50I.5@24.978,57.761 24.981,57.758 v1(24.981,56.816) ; 24.978,59.259 R244I.2@25.311,59.592
  Bottom Layer w0.152: IC50I.5@24.978,57.761 24.978,59.472 R244I.2@25.12,59.614
NetC141J_2: C141J.2 D12J.2 IC49J.1 IC50J.5 R244J.2 R246J.2 | length 14.4
  Top Layer w0.102: v1(26.731,39.566) 26.731,39.478 27.236,38.972 IC49J.1@27.236,37.411
  Top Layer w0.152: v1(26.731,39.566) 26.731,41.166 26.131,41.766 26.131,42.348 25.879,42.6 25.879,44.649 26.489,45.26 D12J.2@26.489,45.86 26.139,46.21 C141J.2@26.139,47.08 26.159,47.06 R246J.2@27.054,47.06
  Bottom Layer w0.102: 26.728,41.98 IC50J.5@26.728,40.511 26.731,40.508 v1(26.731,39.566) ; 26.728,42.009 R244J.2@27.061,42.342
NetC141K_2: C141K.2 D12K.2 IC49K.1 IC50K.5 R244K.2 R246K.2 | length 14.6
  Top Layer w0.102: v1(28.731,56.816) 28.731,56.728 29.236,56.222 IC49K.1@29.236,54.661
  Top Layer w0.152: v1(28.731,56.816) 28.731,58.416 28.131,59.016 28.131,59.598 27.839,59.89 27.839,61.86 28.489,62.51 D12K.2@28.489,63.11 28.139,63.46 C141K.2@28.139,64.33 28.159,64.31 R246K.2@29.054,64.31
  Bottom Layer w0.102: IC50K.5@28.728,57.761 28.731,57.758 v1(28.731,56.816) ; R244K.2@28.956,59.487 R244K.2@29.061,59.592
  Bottom Layer w0.152: IC50K.5@28.728,57.761 28.728,59.463 R244K.2@28.854,59.588
NetC141L_2: C141L.2 D12L.2 IC49L.1 IC50L.5 R244L.2 R246L.2 | length 14.4
  Top Layer w0.102: v1(30.481,39.566) 30.481,39.478 30.986,38.972 IC49L.1@30.986,37.411
  Top Layer w0.152: v1(30.481,39.566) 30.481,41.166 29.881,41.766 29.881,42.348 29.655,42.573 29.655,44.676 30.239,45.26 D12L.2@30.239,45.86 29.889,46.21 C141L.2@29.889,47.08 29.909,47.06 R246L.2@30.804,47.06
  Bottom Layer w0.102: 30.478,41.98 IC50L.5@30.478,40.511 30.481,40.508 v1(30.481,39.566) ; 30.478,42.009 R244L.2@30.811,42.342
NetC141M_2: C141M.2 D12M.2 IC49M.1 IC50M.5 R244M.2 R246M.2 | length 14.4
  Top Layer w0.102: v1(32.481,56.816) 32.481,56.728 32.986,56.222 IC49M.1@32.986,54.661
  Top Layer w0.152: v1(32.481,56.816) 32.481,58.416 31.881,59.016 31.881,59.598 31.589,59.89 31.589,61.86 32.239,62.51 D12M.2@32.239,63.11 31.889,63.46 C141M.2@31.889,64.33 31.909,64.31 R246M.2@32.804,64.31
  Bottom Layer w0.102: IC50M.5@32.478,57.761 32.481,57.758 v1(32.481,56.816)
  Bottom Layer w0.152: IC50M.5@32.478,57.761 32.478,59.53 R244M.2@32.563,59.614
NetC141N_2: C141N.2 D12N.2 IC49N.1 IC50N.5 R244N.2 R246N.2 | length 14.4
  Top Layer w0.102: v1(34.231,39.566) 34.231,39.478 34.736,38.972 IC49N.1@34.736,37.411
  Top Layer w0.152: v1(34.231,39.566) 34.231,41.166 33.631,41.766 33.631,42.348 33.404,42.575 33.404,44.675 33.989,45.26 D12N.2@33.989,45.86 33.639,46.21 C141N.2@33.639,47.08 33.659,47.06 R246N.2@34.554,47.06
  Bottom Layer w0.102: 34.228,41.98 IC50N.5@34.228,40.511 34.231,40.508 v1(34.231,39.566) ; 34.228,42.009 R244N.2@34.561,42.342
NetC141O_2: C141O.2 D12O.2 IC49O.1 IC50O.5 R244O.2 R246O.2 | length 14.5
  Top Layer w0.102: v1(36.231,56.816) 36.231,56.728 36.736,56.222 IC49O.1@36.736,54.661
  Top Layer w0.152: v1(36.231,56.816) 36.231,58.416 35.631,59.016 35.631,59.598 35.339,59.89 35.339,61.86 35.989,62.51 D12O.2@35.989,63.11 35.639,63.46 C141O.2@35.639,64.33 35.659,64.31 R246O.2@36.554,64.31
  Bottom Layer w0.102: IC50O.5@36.228,57.761 36.231,57.758 v1(36.231,56.816) ; R244O.2@36.427,59.458 R244O.2@36.561,59.592
  Bottom Layer w0.152: IC50O.5@36.228,57.761 36.228,59.419 R244O.2@36.347,59.538
NetC141P_2: C141P.2 D12P.2 IC49P.1 IC50P.5 R244P.2 R246P.2 | length 14.4
  Top Layer w0.102: v1(37.981,39.566) 37.981,39.478 38.486,38.972 IC49P.1@38.486,37.411
  Top Layer w0.152: v1(37.981,39.566) 37.981,41.166 37.381,41.766 37.381,42.348 37.167,42.562 37.167,42.626 37.186,42.645 37.186,44.706 37.739,45.26 D12P.2@37.739,45.86 37.389,46.21 C141P.2@37.389,47.08 37.409,47.06 R246P.2@38.304,47.06
  Bottom Layer w0.102: 37.978,41.98 IC50P.5@37.978,40.511 37.981,40.508 v1(37.981,39.566) ; 37.978,42.009 R244P.2@38.311,42.342
NetC141Q_2: C141Q.2 D12Q.2 IC49Q.1 IC50Q.5 R244Q.2 R246Q.2 | length 14.6
  Top Layer w0.102: v1(39.981,56.816) 39.981,56.728 40.486,56.222 IC49Q.1@40.486,54.661
  Top Layer w0.152: v1(39.981,56.816) 39.981,58.416 39.381,59.016 39.381,59.598 39.089,59.89 39.089,61.86 39.739,62.51 D12Q.2@39.739,63.11 39.389,63.46 C141Q.2@39.389,64.33 39.409,64.31 R246Q.2@40.304,64.31
  Bottom Layer w0.102: IC50Q.5@39.978,57.761 39.981,57.758 v1(39.981,56.816) ; R244Q.2@40.22,59.501 R244Q.2@40.311,59.592
  Bottom Layer w0.152: IC50Q.5@39.978,57.761 39.978,59.486 R244Q.2@40.106,59.614
NetC141R_2: C141R.2 D12R.2 IC49R.1 IC50R.5 R244R.2 R246R.2 | length 14.5
  Top Layer w0.102: v1(41.731,39.566) 41.731,39.478 42.236,38.972 IC49R.1@42.236,37.411
  Top Layer w0.152: v1(41.731,39.566) 41.731,41.166 41.131,41.766 41.131,42.348 40.872,42.607 40.872,42.891 40.839,42.923 40.839,44.61 41.489,45.26 D12R.2@41.489,45.86 41.139,46.21 C141R.2@41.139,47.08 41.159,47.06 R246R.2@42.054,47.06
  Bottom Layer w0.102: 41.728,41.98 IC50R.5@41.728,40.511 41.731,40.508 v1(41.731,39.566) ; 41.728,42.009 R244R.2@42.061,42.342
NetC141S_2: C141S.2 D12S.2 IC49S.1 IC50S.5 R244S.2 R246S.2 | length 14.4
  Top Layer w0.102: v1(43.731,56.816) 43.731,56.728 44.236,56.222 IC49S.1@44.236,54.661
  Top Layer w0.152: v1(43.731,56.816) 43.731,58.416 43.131,59.016 43.131,59.598 42.839,59.89 42.839,61.86 43.489,62.51 D12S.2@43.489,63.11 43.139,63.46 C141S.2@43.139,64.33 43.159,64.31 R246S.2@44.054,64.31
  Bottom Layer w0.102: IC50S.5@43.728,57.761 43.731,57.758 v1(43.731,56.816)
  Bottom Layer w0.152: IC50S.5@43.728,57.761 43.728,59.502 R244S.2@43.815,59.588
NetC141T_2: C141T.2 D12T.2 IC49T.1 IC50T.5 R244T.2 R246T.2 | length 14.4
  Top Layer w0.102: v1(45.481,39.566) 45.481,39.478 45.986,38.972 IC49T.1@45.986,37.411
  Top Layer w0.152: v1(45.481,39.566) 45.481,41.166 44.881,41.766 44.881,42.348 44.654,42.575 44.654,44.675 45.239,45.26 D12T.2@45.239,45.86 44.889,46.21 C141T.2@44.889,47.08 44.909,47.06 R246T.2@45.804,47.06
  Bottom Layer w0.102: 45.478,41.98 IC50T.5@45.478,40.511 45.481,40.508 v1(45.481,39.566) ; 45.478,42.009 R244T.2@45.811,42.342
NetC141U_2: C141U.2 D12U.2 IC49U.1 IC50U.5 R244U.2 R246U.2 | length 14.6
  Top Layer w0.102: v1(47.481,56.816) 47.481,56.728 47.986,56.222 IC49U.1@47.986,54.661
  Top Layer w0.152: v1(47.481,56.816) 47.481,58.416 46.881,59.016 46.881,59.598 46.589,59.89 46.589,61.86 47.239,62.51 D12U.2@47.239,63.11 46.889,63.46 C141U.2@46.889,64.33 46.909,64.31 R246U.2@47.804,64.31
  Bottom Layer w0.102: IC50U.5@47.478,57.761 47.481,57.758 v1(47.481,56.816) ; R244U.2@47.704,59.484 R244U.2@47.811,59.592
  Bottom Layer w0.152: IC50U.5@47.478,57.761 47.478,59.467 R244U.2@47.599,59.588
NetC141V_2: C141V.2 D12V.2 IC49V.1 IC50V.5 R244V.2 R246V.2 | length 14.4
  Top Layer w0.102: v1(49.231,39.566) 49.231,39.478 49.736,38.972 IC49V.1@49.736,37.411
  Top Layer w0.152: v1(49.231,39.566) 49.231,41.166 48.631,41.766 48.631,42.348 48.417,42.562 48.417,42.626 48.442,42.651 48.442,44.713 48.989,45.26 D12V.2@48.989,45.86 48.639,46.21 C141V.2@48.639,47.08 48.659,47.06 R246V.2@49.554,47.06
  Bottom Layer w0.102: 49.228,41.98 IC50V.5@49.228,40.511 49.231,40.508 v1(49.231,39.566) ; 49.228,42.009 R244V.2@49.561,42.342
NetC141W_2: C141W.2 D12W.2 IC49W.1 IC50W.5 R244W.2 R246W.2 | length 15
  Top Layer w0.102: v1(51.231,56.816) 51.231,56.728 51.736,56.222 IC49W.1@51.736,54.661
  Top Layer w0.152: v1(51.231,56.816) 51.231,58.416 50.631,59.016 ; R246W.2@51.554,64.31 50.659,64.31 C141W.2@50.639,64.33 50.639,63.46 D12W.2@50.989,63.11 50.989,62.51 50.339,61.86 50.339,59.89 50.631,59.598 ; 50.631,59.016 50.631,59.598 ; 50.631,59.016 50.631,59.598
  Bottom Layer w0.102: IC50W.5@51.228,57.761 51.231,57.758 v1(51.231,56.816) ; 51.228,59.259 R244W.2@51.561,59.592
  Bottom Layer w0.152: IC50W.5@51.228,57.761 51.228,59.167
NetC141X_2: C141X.2 D12X.2 IC49X.1 IC50X.5 R244X.2 R246X.2 | length 14.5
  Top Layer w0.102: v1(52.981,39.566) 52.981,39.478 53.486,38.972 IC49X.1@53.486,37.411
  Top Layer w0.152: v1(52.981,39.566) 52.981,41.166 52.381,41.766 52.381,42.348 52.122,42.607 52.122,42.851 52.107,42.866 52.107,44.627 52.739,45.26 D12X.2@52.739,45.86 52.389,46.21 C141X.2@52.389,47.08 52.409,47.06 R246X.2@53.304,47.06
  Bottom Layer w0.102: 52.978,41.98 IC50X.5@52.978,40.511 52.981,40.508 v1(52.981,39.566) ; 52.978,42.009 R244X.2@53.311,42.342
NetC141Y_2: C141Y.2 D12Y.2 IC49Y.1 IC50Y.5 R244Y.2 R246Y.2 | length 14.4
  Top Layer w0.102: v1(54.981,56.816) 54.981,56.728 55.486,56.222 IC49Y.1@55.486,54.661
  Top Layer w0.152: v1(54.981,56.816) 54.981,58.416 54.381,59.016 54.381,59.598 54.089,59.89 54.089,61.86 54.739,62.51 D12Y.2@54.739,63.11 54.389,63.46 C141Y.2@54.389,64.33 54.409,64.31 R246Y.2@55.304,64.31
  Bottom Layer w0.102: IC50Y.5@54.978,57.761 54.981,57.758 v1(54.981,56.816)
  Bottom Layer w0.152: IC50Y.5@54.978,57.761 54.978,59.525 R244Y.2@55.042,59.588
NetC141Z_2: C141Z.2 D12Z.2 IC49Z.1 IC50Z.5 R244Z.2 R246Z.2 | length 14.4
  Top Layer w0.102: v1(56.731,39.566) 56.731,39.478 57.236,38.972 IC49Z.1@57.236,37.411
  Top Layer w0.152: v1(56.731,39.566) 56.731,41.166 56.131,41.766 56.131,42.348 55.917,42.562 55.917,42.626 55.923,42.633 55.923,44.694 56.489,45.26 D12Z.2@56.489,45.86 56.139,46.21 C141Z.2@56.139,47.08 56.159,47.06 R246Z.2@57.054,47.06
  Bottom Layer w0.102: v1(56.731,39.566) 56.731,40.508 IC50Z.5@56.728,40.511 56.728,42.009 R244Z.2@57.061,42.342
NetC163_2: C163.2 IC60.1 R309.2 | length 2.7
  Top Layer w0.102: C163.2@68.174,21.151 68.219,21.196 69.113,21.196 68.951,21.359 IC60.1@68.951,22.894
NetF6_2: F6.2 J41.19 | length 1
  Top Layer w0.152: J41.19@17.116,76.68 17.326,76.68 17.882,76.124
  other v1: 17.805,75.844 18.313,75.844 17.704,76.302 18.288,76.302
NetIC50[_3: IC50[.3 IC51[.4 | length 4.9
  Top Layer w0.152: v1(59.569,50.847) 59.655,50.761 IC51[.4@60.436,50.761
  Bottom Layer w0.152: IC50[.3@59.228,54.661 59.228,53.201 59.569,52.86 59.569,51.822 59.64,51.752 59.64,51.314 59.569,51.243 v1(59.569,50.847)
NetIC50\_3: IC50\.3 IC51\.4 | length 4.9
  Top Layer w0.152: v1(61.319,33.597) 61.405,33.511 IC51\.4@62.186,33.511
  Bottom Layer w0.152: IC50\.3@60.978,37.411 60.978,35.951 61.319,35.61 61.319,34.572 61.39,34.502 61.39,34.064 61.319,33.993 v1(61.319,33.597)
NetIC50]_3: IC50].3 IC51].4 | length 4.9
  Top Layer w0.152: v1(63.319,50.847) 63.405,50.761 IC51].4@64.186,50.761
  Bottom Layer w0.152: IC50].3@62.978,54.661 62.978,53.201 63.319,52.86 63.319,51.822 63.39,51.752 63.39,51.314 63.319,51.243 v1(63.319,50.847)
NetIC50^_3: IC50^.3 IC51^.4 | length 4.9
  Top Layer w0.152: v1(65.069,33.597) 65.155,33.511 IC51^.4@65.936,33.511
  Bottom Layer w0.152: IC50^.3@64.728,37.411 64.728,35.951 65.069,35.61 65.069,34.572 65.14,34.502 65.14,34.064 65.069,33.993 v1(65.069,33.597)
NetIC50__3: IC50_.3 IC51_.4 | length 4.9
  Top Layer w0.152: v1(67.069,50.847) 67.155,50.761 IC51_.4@67.936,50.761
  Bottom Layer w0.152: IC50_.3@66.728,54.661 66.728,53.201 67.069,52.86 67.069,51.822 67.14,51.752 67.14,51.314 67.069,51.243 v1(67.069,50.847)
NetIC50`_3: IC50`.3 IC51`.4 | length 4.9
  Top Layer w0.152: v1(68.819,33.597) 68.905,33.511 IC51`.4@69.686,33.511
  Bottom Layer w0.152: IC50`.3@68.478,37.411 68.478,35.951 68.819,35.61 68.819,34.572 68.89,34.502 68.89,34.064 68.819,33.993 v1(68.819,33.597)
NetIC50A_3: IC50A.3 IC51A.4 | length 4.9
  Top Layer w0.152: v1(10.819,50.847) 10.905,50.761 IC51A.4@11.686,50.761
  Bottom Layer w0.152: IC50A.3@10.478,54.661 10.478,53.201 10.819,52.86 10.819,51.822 10.89,51.752 10.89,51.314 10.819,51.243 v1(10.819,50.847)
NetIC50B_3: IC50B.3 IC51B.4 | length 4.9
  Top Layer w0.152: v1(12.569,33.597) 12.655,33.511 IC51B.4@13.436,33.511
  Bottom Layer w0.152: IC50B.3@12.228,37.411 12.228,35.951 12.569,35.61 12.569,34.572 12.64,34.502 12.64,34.064 12.569,33.993 v1(12.569,33.597)
NetIC50C_3: IC50C.3 IC51C.4 | length 4.9
  Top Layer w0.152: v1(14.569,50.847) 14.655,50.761 IC51C.4@15.436,50.761
  Bottom Layer w0.152: IC50C.3@14.228,54.661 14.228,53.201 14.569,52.86 14.569,51.822 14.64,51.752 14.64,51.314 14.569,51.243 v1(14.569,50.847)
NetIC50D_3: IC50D.3 IC51D.4 | length 4.9
  Top Layer w0.152: v1(16.319,33.597) 16.405,33.511 IC51D.4@17.186,33.511
  Bottom Layer w0.152: IC50D.3@15.978,37.411 15.978,35.951 16.319,35.61 16.319,34.572 16.39,34.502 16.39,34.064 16.319,33.993 v1(16.319,33.597)
NetIC50E_3: IC50E.3 IC51E.4 | length 4.9
  Top Layer w0.152: v1(18.319,50.847) 18.405,50.761 IC51E.4@19.186,50.761
  Bottom Layer w0.152: IC50E.3@17.978,54.661 17.978,53.201 18.319,52.86 18.319,51.822 18.39,51.752 18.39,51.314 18.319,51.243 v1(18.319,50.847)
NetIC50F_3: IC50F.3 IC51F.4 | length 4.9
  Top Layer w0.152: v1(20.069,33.597) 20.155,33.511 IC51F.4@20.936,33.511
  Bottom Layer w0.152: IC50F.3@19.728,37.411 19.728,35.951 20.069,35.61 20.069,34.572 20.14,34.502 20.14,34.064 20.069,33.993 v1(20.069,33.597)
NetIC50G_3: IC50G.3 IC51G.4 | length 4.9
  Top Layer w0.152: v1(22.069,50.847) 22.155,50.761 IC51G.4@22.936,50.761
  Bottom Layer w0.152: IC50G.3@21.728,54.661 21.728,53.201 22.069,52.86 22.069,51.822 22.14,51.752 22.14,51.314 22.069,51.243 v1(22.069,50.847)
NetIC50H_3: IC50H.3 IC51H.4 | length 4.9
  Top Layer w0.152: v1(23.819,33.597) 23.905,33.511 IC51H.4@24.686,33.511
  Bottom Layer w0.152: IC50H.3@23.478,37.411 23.478,35.951 23.819,35.61 v1(23.819,33.597)
NetIC50I_3: IC50I.3 IC51I.4 | length 4.9
  Top Layer w0.152: v1(25.819,50.847) 25.905,50.761 IC51I.4@26.686,50.761
  Bottom Layer w0.152: IC50I.3@25.478,54.661 25.478,53.201 25.819,52.86 25.819,51.822 25.89,51.752 25.89,51.314 25.819,51.243 v1(25.819,50.847)
NetIC50J_3: IC50J.3 IC51J.4 | length 4.9
  Top Layer w0.152: v1(27.569,33.597) 27.655,33.511 IC51J.4@28.436,33.511
  Bottom Layer w0.152: IC50J.3@27.228,37.411 27.228,35.951 27.569,35.61 27.569,34.572 27.64,34.502 27.64,34.064 27.569,33.993 v1(27.569,33.597)
NetIC50K_3: IC50K.3 IC51K.4 | length 4.9
  Top Layer w0.152: v1(29.569,50.847) 29.655,50.761 IC51K.4@30.436,50.761
  Bottom Layer w0.152: IC50K.3@29.228,54.661 29.228,53.201 29.569,52.86 29.569,51.822 29.64,51.752 29.64,51.314 29.569,51.243 v1(29.569,50.847)
NetIC50L_3: IC50L.3 IC51L.4 | length 4.9
  Top Layer w0.152: v1(31.319,33.597) 31.405,33.511 IC51L.4@32.186,33.511
  Bottom Layer w0.152: IC50L.3@30.978,37.411 30.978,35.951 31.319,35.61 31.319,34.572 31.39,34.502 31.39,34.064 31.319,33.993 v1(31.319,33.597)
NetIC50M_3: IC50M.3 IC51M.4 | length 4.9
  Top Layer w0.152: v1(33.319,50.847) 33.405,50.761 IC51M.4@34.186,50.761
  Bottom Layer w0.152: IC50M.3@32.978,54.661 32.978,53.201 33.319,52.86 33.319,51.822 33.39,51.752 33.39,51.314 33.319,51.243 v1(33.319,50.847)
NetIC50N_3: IC50N.3 IC51N.4 | length 4.9
  Top Layer w0.152: v1(35.069,33.597) 35.155,33.511 IC51N.4@35.936,33.511
  Bottom Layer w0.152: IC50N.3@34.728,37.411 34.728,35.951 35.069,35.61 35.069,34.572 35.14,34.502 35.14,34.064 35.069,33.993 v1(35.069,33.597)
NetIC50O_3: IC50O.3 IC51O.4 | length 4.9
  Top Layer w0.152: v1(37.069,50.847) 37.155,50.761 IC51O.4@37.936,50.761
  Bottom Layer w0.152: IC50O.3@36.728,54.661 36.728,53.201 37.069,52.86 37.069,51.822 37.14,51.752 37.14,51.314 37.069,51.243 v1(37.069,50.847)
NetIC50P_3: IC50P.3 IC51P.4 | length 4.9
  Top Layer w0.152: v1(38.819,33.597) 38.905,33.511 IC51P.4@39.686,33.511
  Bottom Layer w0.152: IC50P.3@38.478,37.411 38.478,35.951 38.819,35.61 38.819,34.572 38.89,34.502 38.89,34.064 38.819,33.993 v1(38.819,33.597)
NetIC50Q_3: IC50Q.3 IC51Q.4 | length 4.9
  Top Layer w0.152: v1(40.819,50.847) 40.905,50.761 IC51Q.4@41.686,50.761
  Bottom Layer w0.152: IC50Q.3@40.478,54.661 40.478,53.201 40.819,52.86 40.819,51.822 40.89,51.752 40.89,51.314 40.819,51.243 v1(40.819,50.847)
NetIC50R_3: IC50R.3 IC51R.4 | length 4.9
  Top Layer w0.152: v1(42.569,33.597) 42.655,33.511 IC51R.4@43.436,33.511
  Bottom Layer w0.152: IC50R.3@42.228,37.411 42.228,35.951 42.569,35.61 42.569,34.572 42.64,34.502 42.64,34.064 42.569,33.993 v1(42.569,33.597)
NetIC50S_3: IC50S.3 IC51S.4 | length 4.9
  Top Layer w0.152: v1(44.569,50.847) 44.655,50.761 IC51S.4@45.436,50.761
  Bottom Layer w0.152: IC50S.3@44.228,54.661 44.228,53.201 44.569,52.86 44.569,51.822 44.64,51.752 44.64,51.314 44.569,51.243 v1(44.569,50.847)
NetIC50T_3: IC50T.3 IC51T.4 | length 4.9
  Top Layer w0.152: v1(46.319,33.597) 46.405,33.511 IC51T.4@47.186,33.511
  Bottom Layer w0.152: IC50T.3@45.978,37.411 45.978,35.951 46.319,35.61 46.319,34.572 46.39,34.502 46.39,34.064 46.319,33.993 v1(46.319,33.597)
NetIC50U_3: IC50U.3 IC51U.4 | length 4.9
  Top Layer w0.152: v1(48.319,50.847) 48.405,50.761 IC51U.4@49.186,50.761
  Bottom Layer w0.152: IC50U.3@47.978,54.661 47.978,53.201 48.319,52.86 48.319,51.822 48.39,51.752 48.39,51.314 48.319,51.243 v1(48.319,50.847)
NetIC50V_3: IC50V.3 IC51V.4 | length 4.9
  Top Layer w0.152: v1(50.069,33.597) 50.155,33.511 IC51V.4@50.936,33.511
  Bottom Layer w0.152: IC50V.3@49.728,37.411 49.728,35.951 50.069,35.61 50.069,34.572 50.14,34.502 50.14,34.064 50.069,33.993 v1(50.069,33.597)
NetIC50W_3: IC50W.3 IC51W.4 | length 4.9
  Top Layer w0.152: v1(52.069,50.847) 52.155,50.761 IC51W.4@52.936,50.761
  Bottom Layer w0.152: IC50W.3@51.728,54.661 51.728,53.201 52.069,52.86 52.069,51.822 52.14,51.752 52.14,51.314 52.069,51.243 v1(52.069,50.847)
NetIC50X_3: IC50X.3 IC51X.4 | length 4.9
  Top Layer w0.152: v1(53.819,33.597) 53.905,33.511 IC51X.4@54.686,33.511
  Bottom Layer w0.152: IC50X.3@53.478,37.411 53.478,35.951 53.819,35.61 53.819,34.572 53.89,34.502 53.89,34.064 53.819,33.993 v1(53.819,33.597)
NetIC50Y_3: IC50Y.3 IC51Y.4 | length 4.9
  Top Layer w0.152: v1(55.819,50.847) 55.905,50.761 IC51Y.4@56.686,50.761
  Bottom Layer w0.152: IC50Y.3@55.478,54.661 55.478,53.201 55.819,52.86 55.819,51.822 55.89,51.752 55.89,51.314 55.819,51.243 v1(55.819,50.847)
NetIC50Z_3: IC50Z.3 IC51Z.4 | length 4.9
  Top Layer w0.152: v1(57.569,33.597) 57.655,33.511 IC51Z.4@58.436,33.511
  Bottom Layer w0.152: IC50Z.3@57.228,37.411 57.228,35.951 57.569,35.61 57.569,34.572 57.64,34.502 57.64,34.064 57.569,33.993 v1(57.569,33.597)
NetIC56_9: IC56.9 IC57.14 | length 23.6
  Top Layer w0.152: IC56.9@18.586,25.636 18.586,24.305 21.107,21.784 v1@31.394,21.784 ; v1(31.344,23.994) 31.369,24.019 31.369,27.778 32.477,28.886 IC57.14@33.336,28.886
  Bottom Layer w0.152: v1(31.344,23.994) 31.344,21.911 v1(31.394,21.86)
NetIC57_9: IC57.9 IC58.14 | length 18.7
  Top Layer w0.102: IC57.9@33.336,25.636 36.051,25.636 37.74,23.948 44.379,23.948 45.593,25.162 45.593,26.559 47.67,28.636 IC58.14@48.586,28.636
NetIC58_9: IC58.9 IC59.14 | length 18.2
  Top Layer w0.102: IC58.9@48.586,25.386 48.586,24.505 49.149,23.943 58.979,23.943 60.147,25.111 60.147,25.846 61.735,27.434 61.735,28.019 62.101,28.386 IC59.14@63.086,28.386
NetIC60_5: IC60.5 R312.1 | length 1.6
  Top Layer w0.102: IC60.5@70.901,27.144 70.901,28.674 R312.1@70.917,28.689
NetJ40_c2: J40.c2
NetJ40_c3: J40.c3
NetJ40_c6: J40.c6
NetJ40_c7: J40.c7
NetJ40_d4: J40.d4
NetJ40_d5: J40.d5
NetJ40_d30: J40.d30 J40.d31 | length 2.7
  Top Layer w0.224: J40.d30@49.992,12.606 50.063,12.677 v1(50.063,13.31) ; J40.d31@51.262,12.606 51.262,13.264 v1(51.283,13.284)
  Bottom Layer w0.224: v1(50.063,13.31) 50.089,13.284 v1(51.283,13.284)
NetJ40_g2: J40.g2
NetJ40_g3: J40.g3
NetJ40_h4: J40.h4
NetJ40_h5: J40.h5
NetR1[_1: R1[.1 R244[.1 R245[.1 | length 2.3
  Top Layer w0.152: R245[.1@60.052,59.566 v1(60.725,59.566)
  Bottom Layer w0.152: R244[.1@60.001,59.592 v1@60.699,59.592 ; v1(60.725,59.566) R1[.1@60.725,60.493
NetR1\_1: R1\.1 R244\.1 R245\.1 | length 2.3
  Top Layer w0.152: R245\.1@61.802,42.316 v1(62.475,42.316)
  Bottom Layer w0.152: R244\.1@61.751,42.342 v1@62.449,42.342 ; v1(62.475,42.316) R1\.1@62.475,43.243
NetR1]_1: R1].1 R244].1 R245].1 | length 2.3
  Top Layer w0.152: R245].1@63.802,59.566 v1(64.475,59.566)
  Bottom Layer w0.152: R244].1@63.751,59.592 v1@64.449,59.592 ; v1(64.475,59.566) R1].1@64.475,60.493